# EAGLE board potboard (EAGLE 9.5.2)

Size 142.21 x 51.25 mm. Coordinates in mm from the lower left corner, seen from the top.
Outline: 0,0 142.21,0 142.21,51.25 0,51.25 0,0
Outline: circle at 121,38 radius 4.5
Outline: circle at 88,38 radius 4
Outline: circle at 26,39 radius 4
Outline: circle at 7,37 radius 4.5
Copper layers (1*16): Top 0.035mm / dielectric 1.5mm / Bottom 0.035mm
Design rules "default": minimum track width 6mil, minimum drill 0.35mm, track to track 6mil, track to pad 6mil, pad to pad 6mil, via to via 6mil, smd to smd 6mil, copper to edge 40mil, drill to drill 6mil, minimum pad ring 10mil, minimum via ring 8mil, stop-mask expansion 4mil, vias tented up to drill 0mil, thermal gap 10mil

## Footprints (pad centres in the part's own frame; a part is rotated, then mirrored left to right if it is on the bottom)
C1206 = smd 1.6 x 1.8: 1 -1.4,0; 2 1.4,0
POT_S4 = drill 1: DUMMY 3.75,-11.05; GND -3.75,-11; SIGNAL -1.25,-11; VCC 1.25,-11 | drill 2: MOUNT-L -5.5,0; MOUNT-R 5.5,0
SO16 = smd 0.66 x 2.032: 1 -4.445,-3.073; 2 -3.175,-3.073; 3 -1.905,-3.073; 4 -0.635,-3.073; 5 0.635,-3.073; 6 1.905,-3.073; 7 3.175,-3.073; 8 4.445,-3.073; 9 4.445,3.073; 10 3.175,3.073; 11 1.905,3.073; 12 0.635,3.073; 13 -0.635,3.073; 14 -1.905,3.073; 15 -3.175,3.073; 16 -4.445,3.073
53048-10 = drill 0.5 pad 0.698 long: 1 5.625,-1.25; 2 4.375,-1.25; 3 3.125,-1.25; 4 1.875,-1.25; 5 0.625,-1.25; 6 -0.625,-1.25; 7 -1.875,-1.25; 8 -3.125,-1.25; 9 -4.375,-1.25; 10 -5.625,-1.25
53048-06 = drill 0.5 pad 0.698 long: 1 3.125,-1.25; 2 1.875,-1.25; 3 0.625,-1.25; 4 -0.625,-1.25; 5 -1.875,-1.25; 6 -3.125,-1.25
R0805 = smd 1.3 x 1.5: 1 -0.95,0; 2 0.95,0
BUTTON_S4 = drill 0.6: L1 -2.25,-2.25; L2 2.25,-2.25; LED+ 2.25,0; LED- -2.25,0; R1 -2.25,2.25; R2 2.25,2.25 | hole 0.5: 0,2.25

## Placement (x,y rotation side)
C1  [C1206]  31.93,33.69 0 top
C2  [C1206]  65.85,46.69 0 top
FX_1  POT_S4  [POT_S4]  44.39,25.76 0 top
FX_2  POT_S4  [POT_S4]  77.73,26.41 0 top
FX_3  POT_S4  [POT_S4]  110.9,26.03 0 top
FX_DW  POT_S4  [POT_S4]  11.78,25.76 0 top
IC2  74HC595D  [SO16]  27.88,26.71 270 top
IC3  74HC165D  [SO16]  61.23,40.02 270 top
MAIN  53048-10  [53048-10]  40.59,3.81 0 top
POTS  53048-06  [53048-06]  74.66,4.08 0 top
R1  10K  [R0805]  17.39,10.07 0 top
R2  10K  [R0805]  51.31,11.07 0 top
R3  10K  [R0805]  83.49,9.96 0 top
R4  10K  [R0805]  117.41,10.96 0 top
R5  10K  [R0805]  128.33,26.96 0 top
R6  10K  [R0805]  51.25,42.96 0 top
R8  10K  [R0805]  51.17,39.96 0 top
R9  10K  [R0805]  51.09,36.96 0 top
R10  51  [R0805]  29.52,13.07 0 top
R11  51  [R0805]  63.01,12.96 0 top
R12  51  [R0805]  97.17,13.07 0 top
R13  51  [R0805]  129.82,13.07 0 top
R14  51  [R0805]  135.47,23.07 0 top
U$1  BUTTON_S4  [BUTTON_S4]  23.97,12.76 0 top
U$2  BUTTON_S4  [BUTTON_S4]  57.11,13.09 0 top
U$3  BUTTON_S4  [BUTTON_S4]  89.93,12.77 0 top
U$4  BUTTON_S4  [BUTTON_S4]  123.44,13 0 top
U$5  BUTTON_S4  [BUTTON_S4]  134.99,29.75 0 top

## Library data of the parts
C1 C2 = adafruit
FX_1-FX_3 FX_DW U$1-U$5 = S4
IC2 IC3 = 74xx-eu
MAIN = con-molex; MF: MOLEX; MPN: 53048-1010; OC_FARNELL: 9733108; OC_NEWARK: 98K9838
POTS = con-molex; MF: WALDOM/MOLEX; MPN: 53048-0610; OC_FARNELL: 1012260; OC_NEWARK: 38C9911
R1-R6 R8-R14 = rcl; SPICEPREFIX: R

## Nets
GND: C1.2 C2.2 FX_1.GND FX_2.GND FX_3.GND FX_DW.GND IC2.8 IC2.13 IC3.8 MAIN.9 POTS.2 R1.1 R2.1 R3.1 R4.1 R5.1 R6.1 R8.1 R9.1 U$1.LED- U$2.LED- U$3.LED- U$4.LED- U$5.LED-
N$1: IC2.4 R14.2
N$2: FX_DW.SIGNAL POTS.6
N$3: FX_1.SIGNAL POTS.5
N$4: FX_2.SIGNAL POTS.4
N$5: IC3.11 R1.2 U$1.L1 U$1.L2
N$6: IC3.12 R2.2 U$2.L1 U$2.L2
N$7: IC3.13 R3.2 U$3.L1 U$3.L2
N$8: IC3.14 R4.2 U$4.L1 U$4.L2
N$9: IC3.3 R5.2 U$5.L1 U$5.L2
N$10: IC2.3 R13.2
N$11: IC2.2 R12.2
N$12: IC2.1 R11.2
N$13: R10.1 U$1.LED+
N$14: FX_3.SIGNAL POTS.3
N$15: IC2.11 IC3.2 MAIN.8
N$16: IC3.6 R9.2
N$17: IC3.5 R8.2
N$18: IC3.4 R6.2
N$19: IC3.10 MAIN.2
N$20: IC2.15 R10.2
N$21: R11.1 U$2.LED+
N$22: R12.1 U$3.LED+
N$23: R13.1 U$4.LED+
N$24: R14.1 U$5.LED+
N$25: IC2.14 MAIN.7
N$26: IC2.9 MAIN.3
N$27: IC2.12 MAIN.5
N$28: IC3.1 MAIN.4
N$29: IC3.9 MAIN.6
N$30: IC3.15 MAIN.1
VCC: C1.1 C2.1 FX_1.VCC FX_2.VCC FX_3.VCC FX_DW.VCC IC2.10 IC2.16 IC3.16 MAIN.10 POTS.1 U$1.R1 U$1.R2 U$2.R1 U$2.R2 U$3.R1 U$3.R2 U$4.R1 U$4.R2 U$5.R1 U$5.R2

## Tracks (layer width: path | path; a pad name or v marks a point on that pad's centre or on a via)
GND  (23 unrouted)
N$1  (1 unrouted)
N$2  (1 unrouted)
N$3  (1 unrouted)
N$4  (1 unrouted)
N$5  (3 unrouted)
N$6  (3 unrouted)
N$7  (3 unrouted)
N$8  (3 unrouted)
N$9  (3 unrouted)
N$10  (1 unrouted)
N$11  (1 unrouted)
N$12  (1 unrouted)
N$13  (1 unrouted)
N$14  (1 unrouted)
N$15  (2 unrouted)
N$16  (1 unrouted)
N$17  (1 unrouted)
N$18  (1 unrouted)
N$19  (1 unrouted)
N$20  (1 unrouted)
N$21  (1 unrouted)
N$22  (1 unrouted)
N$23  (1 unrouted)
N$24  (1 unrouted)
N$25  (1 unrouted)
N$26  (1 unrouted)
N$27  (1 unrouted)
N$28  (1 unrouted)
N$29  (1 unrouted)
N$30  (1 unrouted)
VCC  (20 unrouted)